# Altium PCB TB16_Control_PCB.PcbDoc
Units mm, origin at the board's own origin, x right, y up, seen from the top; angles counter-clockwise.
Board outline 60 x 43 mm, 2 copper layers (Top Layer, Bottom Layer), stack 1.58 mm thick; 34 components, 49 nets, 159 pads, 68 vias.
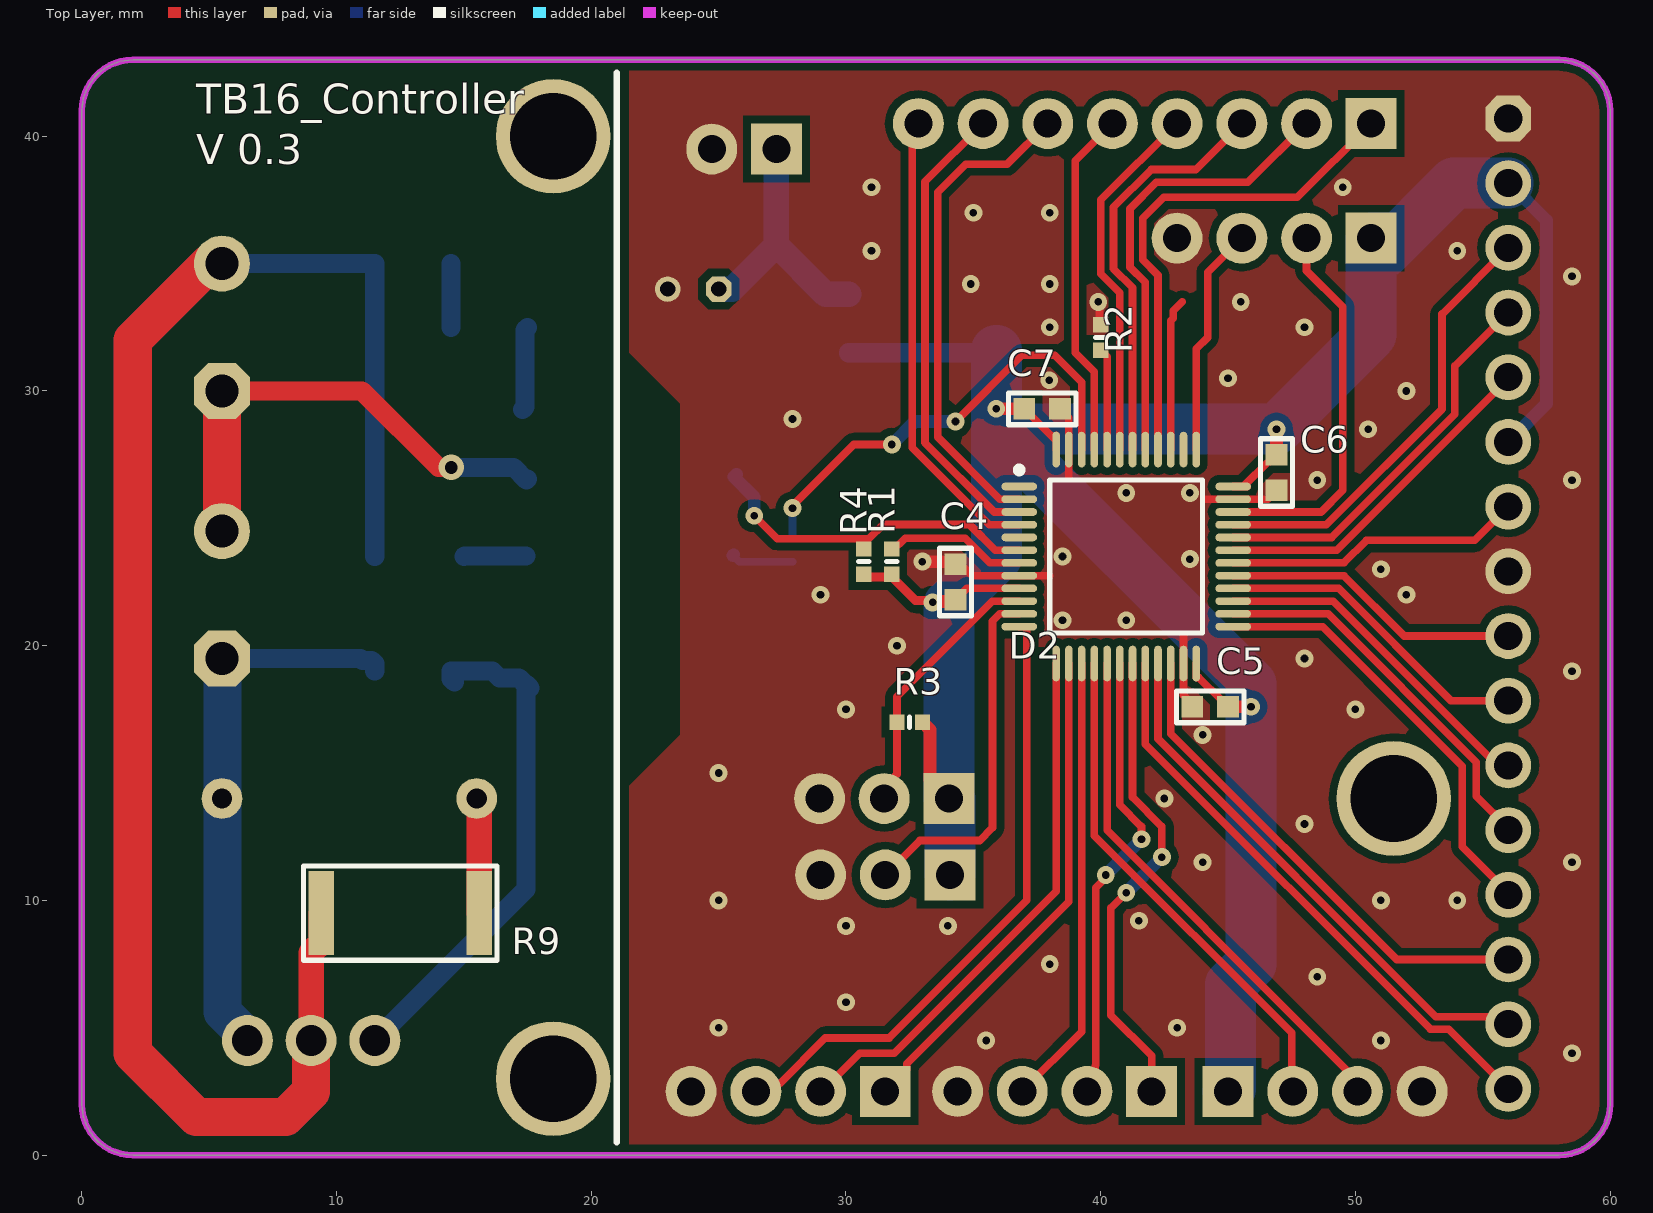
[diagram p0: Top Layer view]
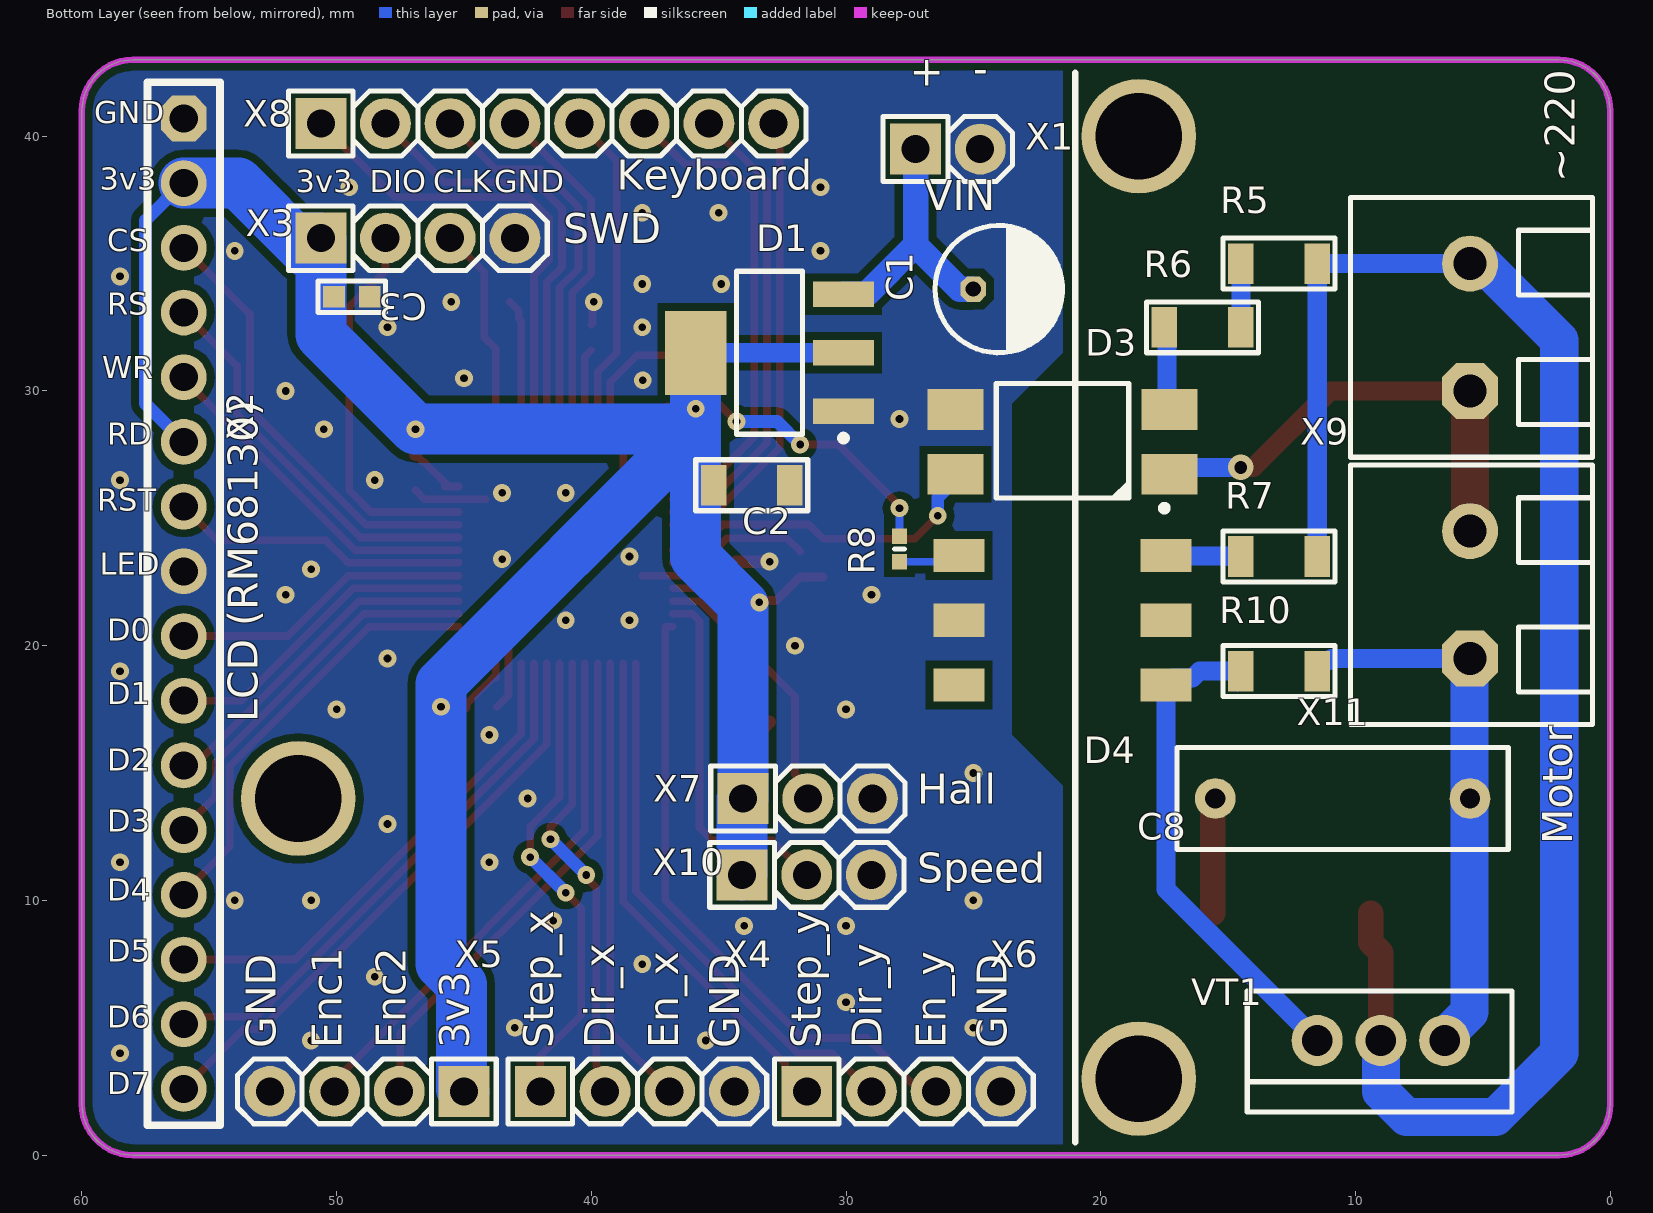
[diagram p1: Bottom Layer view, seen from below]
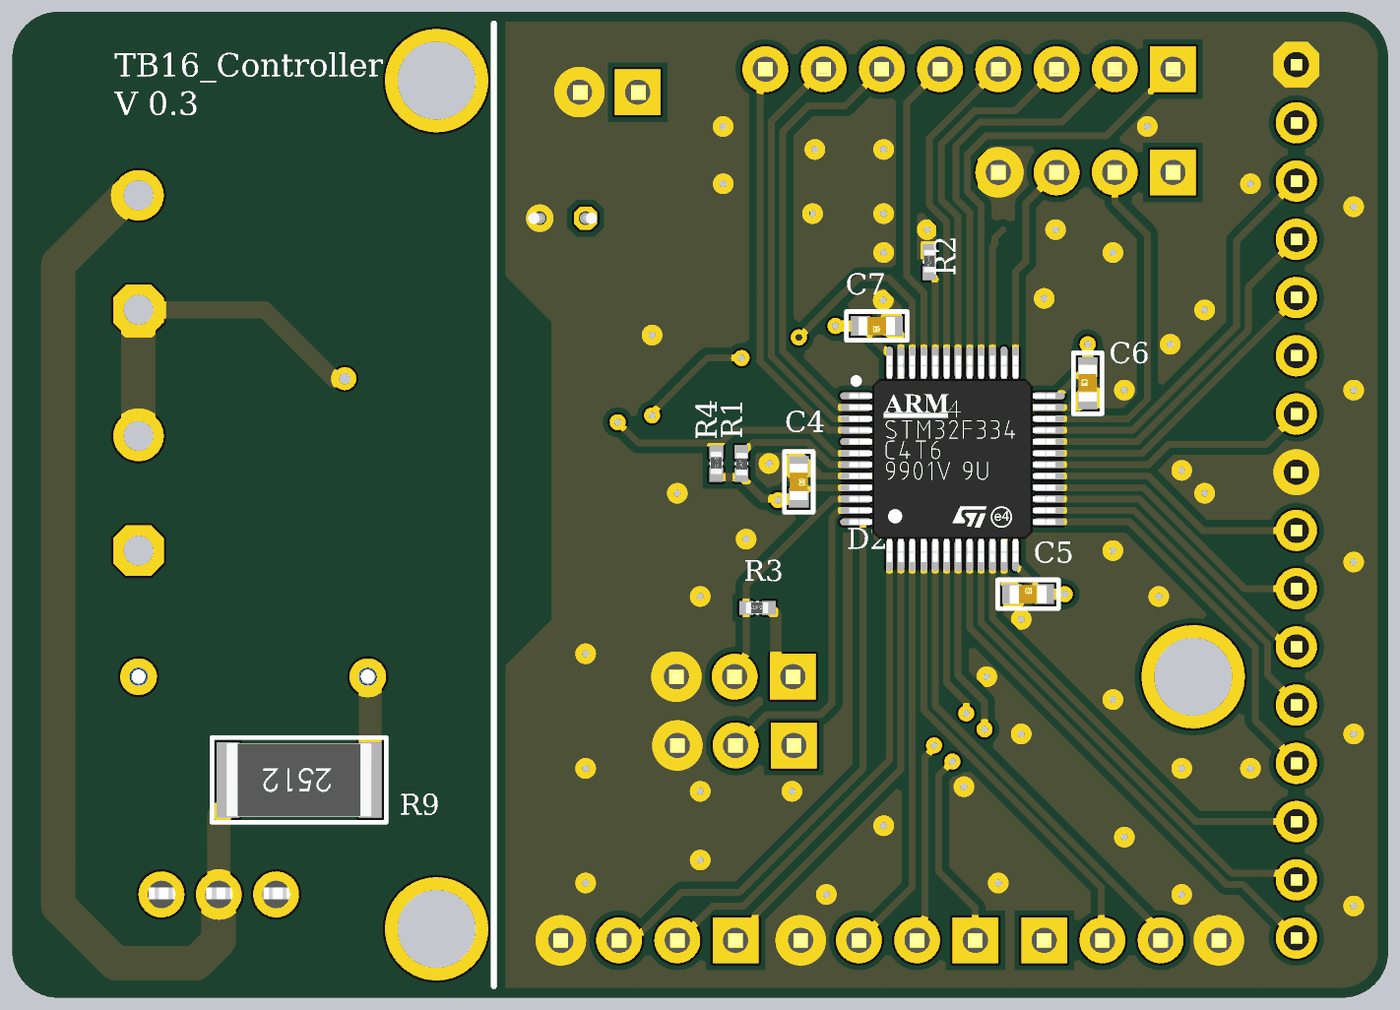
[diagram p2: 3D render of the assembled board from above, using the file's embedded part models]
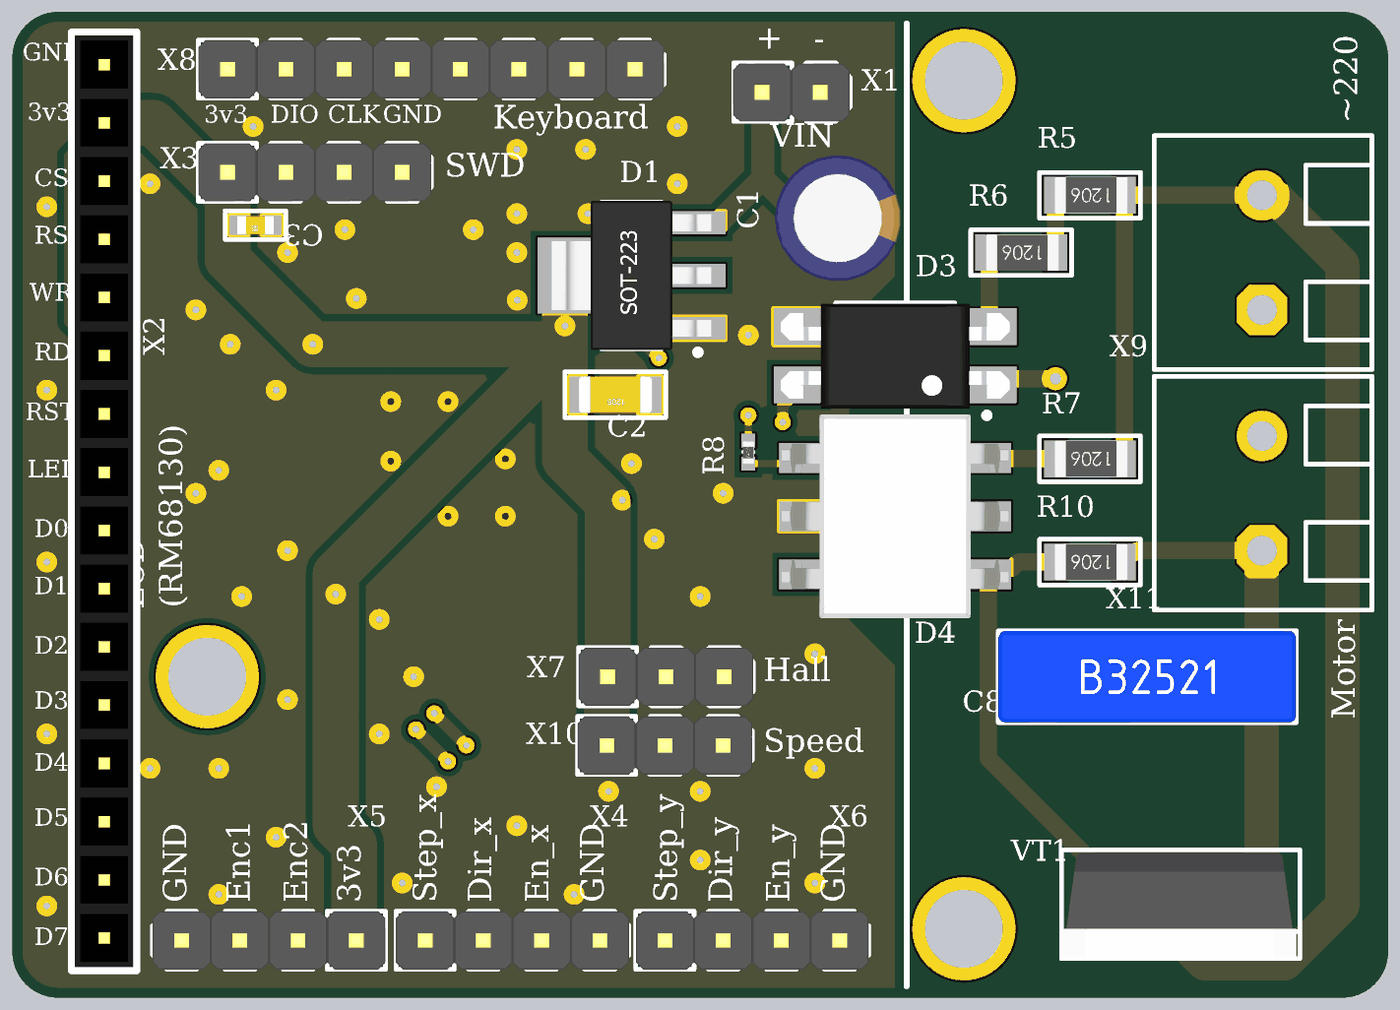
[diagram p3: 3D render of the assembled board from below, using the file's embedded part models]

## Layer stack, top to bottom
Top Solder: solder mask 0.0102, Solder Resist, Dk 3.5
Top Layer: signal copper 0.0356
Dielectric 1: dielectric 1.509, FR-4, Dk 4.8
Bottom Layer: signal copper 0.0356
Bottom Solder: solder mask 0.0102, Solder Resist, Dk 3.5

## Board outline
0,2 0,41 cw(c2,41) 2,43 58,43 cw(c58,41) 60,41 60,2 cw(c58,2) 58,0 2,0 cw(c2,2)

## Design rules (kind name [scope] priority, off if disabled: settings)
Clearance [All] p1: gap=0.2 ignorepadtopadclearanceinfootprint=FALSE except(0.3: Arc-Poly Arc-Hole Track-Poly Track-Hole SMDPad-Poly THPad-Poly Via-Poly Fill-Poly Poly-Poly Poly-Hole)
PlaneConnect [All] p1: planeconnectstyle=Direct reliefexpansion=0.508 reliefentries=4 reliefconductorwidth=0.254 reliefairgap=0.254
PolygonConnect [All] p1: connectstyle=Direct reliefconductorwidth=0.254 reliefentries=4 polygonreliefangle="90 Angle" airgapwidth=0.254
RoutingVias [All] p1: holewidth=0.711 width=1.27 viastyle="Through Hole" minholewidth=0.711 minwidth=1.27 maxholewidth=0.711 maxwidth=1.27
SolderMaskExpansion [All] p1: expansion=0.102 istentingtop=FALSE
Width [All] p1: maxlimit=2 minlimit=0.3 preferedwidth=0.5
29 further rules are at their usual default settings.

## Components (designator, comment, footprint, x,y, rotation, side; value= is the part's Value field where it differs from the comment)
C1 "Aluminium capacitor, 330μF, 25V, ±20%, 54mOhm, 14x10x5 mm, -55...+105°C" "CAP: D5C2H11" 24,34 r180 bottom value=330μF
C2 "Ceramic capacitor, 1μF, X7R, ±10%, 50V, 1206, -55...+125°C" "CAP: 1206" 33.7,26.3 r0 bottom value=1μF
C3 "Ceramic capacitor, 0.1μF, X7R, ±10%, 16V, 603, -55...+125°C" "CAP: 0603" 49.4,33.7 r0 bottom value=0.1μF
C4 "Ceramic capacitor, 0.1μF, X7R, ±10%, 16V, 603, -55...+125°C" "CAP: 0603" 34.3,22.5 r270 top value=0.1μF
C5 "Ceramic capacitor, 0.1μF, X7R, ±10%, 16V, 603, -55...+125°C" "CAP: 0603" 44.3,17.6 r0 top value=0.1μF
C6 "Ceramic capacitor, 0.1μF, X7R, ±10%, 16V, 603, -55...+125°C" "CAP: 0603" 46.9,26.8 r90 top value=0.1μF
C7 "Ceramic capacitor, 0.1μF, X7R, ±10%, 16V, 603, -55...+125°C" "CAP: 0603" 37.7,29.3 r180 top value=0.1μF
C8 "Film capacitor, 0.01μF, 480V, ±10%, 10.9mOhm, 31.5x15 mm, -40...+105°C" "CAP: B32521" 10.5,14 r180 bottom value=0.01μF
D1 "Linear voltage regulator, input 3.9...18V, 0.6V, output 3.3V, 1.2A, -40...+85°C, SOT223" SOT223 33,31.5 r0 bottom
D2 "IC microcontroller, 32-Bit, Cortex-M3, 72MHz, 64KB, 20KB, 2...3.6V, -40...+85°C, 48-LQFP" 48-LQFP 41,23.5 r0 top
D3 "IC optoisolator, 4µs/3µs, 5000Vrms, 35V, -40...+125°C, 4-SMD" 4-SMD 21.5,28 r0 bottom
D4 "MOC3021" SDIP-6 21.5,21 r270 bottom
R1 "Resistor film, 1k, ±5%, 402, 0.063W, -55...+125°C" "RES: 0402" 31.8,23.3 r90 top value=1k
R2 "Resistor film, 1k, ±5%, 402, 0.063W, -55...+125°C" "RES: 0402" 40,32.1 r270 top value=1k
R3 "Resistor film, 2k2, ±5%, 402, 0.063W, -55...+125°C" "RES: 0402" 32.5,17 r0 top value=2k2
R4 "Resistor film, 2k2, ±5%, 402, 0.063W, -55...+125°C" "RES: 0402" 30.7,23.3 r270 top value=2k2
R5 "Resistor film, 10k, ±5%, 1206, 0.25W, -55...+125°C" "RES: 1206" 13,35 r0 bottom value=10k
R6 "Resistor film, 10k, ±5%, 1206, 0.25W, -55...+125°C" "RES: 1206" 16,32.5 r0 bottom value=10k
R7 "Resistor film, 680R, ±5%, 1206, 0.25W, -55...+125°C" "RES: 1206" 13,23.5 r0 bottom value=680R
R8 "Resistor film, 1k, ±5%, 402, 0.063W, -55...+125°C" "RES: 0402" 27.9,23.8 r90 bottom value=1k
R9 "Resistor film, 39R, 1W, 2512, 1W, -55...+125°C" "RES: 2512" 12.5,9.5 r180 top value=39R
R10 "Resistor film, 330R, ±5%, 1206, 0.25W, -55...+125°C" "RES: 1206" 13,19 r0 bottom value=330R
VT1 "BTA136" TO220 9,4.5 r0 bottom
X1 "Connector, 2pin, 2.54mm, 500VAC, 3A" "CON: PLS-2" 26,39.5 r180 bottom
X2 "Connector, 16pin, 2.54mm, 500VAC, 3A" "CON: PBS-16" 56,21.65 r270 bottom
X3 "Connector, 4pin, 2.54mm, 500VAC, 3A" "CON: PLS-4" 46.81,36 r180 bottom
X4 "Connector, 4pin, 2.54mm, 500VAC, 3A" "CON: PLS-4" 38.19,2.5 r180 bottom
X5 "Connector, 4pin, 2.54mm, 500VAC, 3A" "CON: PLS-4" 48.81,2.5 r0 bottom
X6 "Connector, 4pin, 2.54mm, 500VAC, 3A" "CON: PLS-4" 27.73,2.5 r180 bottom
X7 "Connector, 3pin, 2.54mm, 500VAC, 3A" "CON: PLS-3" 31.5,14 r180 bottom
X8 "Connector, 8pin, 2.54mm, 500VAC, 3A" "CON: PLS-8" 41.73,40.5 r180 bottom
X9 "Terminal connector, 2pin, 3.5mm, 300VAC, 10A" "CON: 0395430002 (5 mm)" 5.5,32.5 r90 bottom
X10 "Connector, 3pin, 2.54mm, 500VAC, 3A" "CON: PLS-3" 31.54,11 r180 bottom
X11 "Terminal connector, 2pin, 3.5mm, 300VAC, 10A" "CON: 0395430002 (5 mm)" 5.5,22 r90 bottom

## Footprints (in the part's own frame and the unit in brackets; to place one, negate y for a bottom-side part, rotate by r counter-clockwise, add the part's x,y. Pads: shape width x height; smd on the part's side, far side on the other; paste and mask are expansions set on the pad)
4-SMD [mm] "SOIC, 4-Leads, Body 4,60x6,50mm, Pitch 1,27mm, IPC Medium Density"
  rect 2.2x1.6 smd: 1(-4.2,1.27) 2(-4.2,-1.27) 3(4.2,-1.27) 4(4.2,1.27)
  round 0.5 on Mech2: ""(-2.1,1.7)
  silkscreen extent -4.12,-2.3 2.6,2.72, body extent -5,-2.28 5,2.3, height 3.75
48-LQFP [mm] "QFP, 48-Leads, Body 7x7mm, Pitch 0.5mm, IPC Medium Density"
  oval 1.4x0.3 smd: 1(-4.2,2.75) 2(-4.2,2.25) 3(-4.2,1.75) 4(-4.2,1.25) 5(-4.2,0.75) 6(-4.2,0.25) 7(-4.2,-0.25) 8(-4.2,-0.75) 9(-4.2,-1.25) 10(-4.2,-1.75) 11(-4.2,-2.25) 12(-4.2,-2.75) 25(4.2,-2.75) 26(4.2,-2.25) 27(4.2,-1.75) 28(4.2,-1.25) 29(4.2,-0.75) 30(4.2,-0.25) 31(4.2,0.25) 32(4.2,0.75) 33(4.2,1.25) 34(4.2,1.75) 35(4.2,2.25) 36(4.2,2.75)
  oval 0.3x1.4 smd: 13(-2.75,-4.2) 14(-2.25,-4.2) 15(-1.75,-4.2) 16(-1.25,-4.2) 17(-0.75,-4.2) 18(-0.25,-4.2) 19(0.25,-4.2) 20(0.75,-4.2) 21(1.25,-4.2) 22(1.75,-4.2) 23(2.25,-4.2) 24(2.75,-4.2) 37(2.75,4.2) 38(2.25,4.2) 39(1.75,4.2) 40(1.25,4.2) 41(0.75,4.2) 42(0.25,4.2) 43(-0.25,4.2) 44(-0.75,4.2) 45(-1.25,4.2) 46(-1.75,4.2) 47(-2.25,4.2) 48(-2.75,4.2)
  round 0.5 on Mech1: ""(-4,4)
  silkscreen extent -4.32,-3 3,3.52, body extent -4.5,-4.5 4.5,4.5, height 1.6
"CAP: 0603" [mm]
  rect 0.85x0.85 smd: 1(-0.7,0) 2(0.7,0)
  silkscreen extent -1.33,-0.63 1.33,0.63, body extent -0.8,-0.4 0.8,0.4, height 0.3
"CAP: 1206" [mm]
  rect 1x1.6 smd: 1(-1.5,0) 2(1.5,0)
  silkscreen extent -2.2,-1 2.2,1, body extent -1.6,-0.8 1.6,0.8, height 1
"CAP: B32521" [mm]
  round 1.6 hole 0.8: 1(-5,0) 2(5,0)
  silkscreen extent -6.5,-2 6.5,2, body extent -6.5,-2 6.5,2, height 9
"CAP: D5C2H11" [mm]
  oct 1x1 hole 0.6: 1(-1,0)
  round 1 hole 0.6: 2(1,0)
  silkscreen extent -2.5,-2.5 2.5,2.5, body extent -2.75,-2.75 2.75,2.75, height 13.5
"CON: 0395430002 (5 mm)" [mm] "2 pin 5.08mm screw connector"
  oct 2.2x2.2 hole 1.3: 1(-2.5,0)
  round 2.2 hole 1.3: 2(2.5,0)
  silkscreen extent -5.1,-4.8 5.1,4.7, body extent -5,-4.8 5,4.6, height 14.63
"CON: PBS-16" [mm] "PBS-16"
  oct 1.8x1.8 hole 1.1: 1(-19.05,0)
  round 1.8 hole 1.1: 2(-16.51,0) 3(-13.97,0) 4(-11.43,0) 5(-8.89,0) 6(-6.35,0) 7(-3.81,0) 8(-1.27,0) 9(1.27,0) 10(3.81,0) 11(6.35,0) 12(8.89,0) 13(11.43,0) 14(13.97,0) 15(16.51,0) 16(19.05,0)
  silkscreen extent -20.48,-1.43 20.48,1.43, body extent -20.32,-1.27 20.32,1.27, height 8.27
"CON: PLS-2" [mm]
  rect 2x2 hole 1.1: 1(-1.27,0)
  round 2 hole 1.1: 2(1.27,0)
  silkscreen extent -2.54,-1.27 2.54,1.27, body extent -2.57,-1.28 2.51,1.26, height 8.54
"CON: PLS-3" [mm]
  rect 2x2 hole 1.1: 1(-2.54,0)
  round 2 hole 1.1: 2(0,0) 3(2.54,0)
  silkscreen extent -3.81,-1.27 3.81,1.27, body extent -3.81,-1.27 3.81,1.27, height 8.54
"CON: PLS-4" [mm] "PLS-40 4 pin header"
  rect 2x2 hole 1.1: 1(-3.81,0)
  round 2 hole 1.1: 2(-1.27,0) 3(1.27,0) 4(3.81,0)
  silkscreen extent -5.08,-1.27 5.08,1.27, body extent -5.08,-1.27 5.08,1.27, height 8.54
"CON: PLS-8" [mm] "PLS-40 8 pin header"
  rect 2x2 hole 1.1: 1(-8.89,0)
  round 2 hole 1.1: 2(-6.35,0) 3(-3.81,0) 4(-1.27,0) 5(1.27,0) 6(3.81,0) 7(6.35,0) 8(8.89,0)
  silkscreen extent -10.16,-1.27 10.16,1.27, body extent -10.16,-1.27 10.16,1.27, height 8.54
"RES: 0402" [mm]
  rect 0.6x0.6 smd: 1(-0.5,0) 2(0.5,0)
  silkscreen extent 0,-0.2 0,0.2, body extent -0.52,-0.25 0.47,0.25, height 0.34
"RES: 1206" [mm]
  rect 1x1.6 smd: 1(-1.5,0) 2(1.5,0)
  silkscreen extent -2.2,-1 2.2,1, body extent -1.65,-0.8 1.55,0.8, height 0.47
"RES: 2512" [mm]
  rect 1x3.3 smd: 1(-3.1,0) 2(3.1,0)
  silkscreen extent -3.8,-1.85 3.8,1.85, body extent -3.17,-1.6 3.18,1.6, height 0.52
SDIP-6 [mm] "DIP-6 SMD"
  rect 1.3x2 smd: 1(-2.54,-4.064) 2(0,-4.064) 3(2.54,-4.064) 4(2.54,4.064) 5(0,4.064) 6(-2.54,4.064)
  body extent -4.44,-4.95 4.45,4.95, height 5.93
SOT223 [mm] "SOT223, 4-Leads, Body 6,50x7,00mm (avg), Pitch 2,30mm, IPC Medium Density"
  rect 2.4x1 smd: 1(-2.9,2.3) 2(-2.9,0) 3(-2.9,-2.3)
  rect 2.4x3.3 smd: 4(2.9,0)
  round 0.5 on Mech2: ""(-3,2.7)
  silkscreen extent -3.02,-3.2 1.3,3.47, body extent -3.48,-3.25 3.48,3.25, height 1.65
TO220 [mm]
  round 2 hole 1.2: 1(-2.5,0) 2(0,0) 3(2.5,0)
  silkscreen extent -5.15,-1.95 5.25,2.8, body extent -5,-1.8 5.2,2.7, height 22.06

## Part data
C1: library part Aluminium, Manufacturer=Wurth, Package="14x10x5 mm", PartNumber=860080475013, Temperature=-55...+105°C, Tolerance=±20%, TypeCapacitor="Aluminium capacitor", Voltage=25V, HelpURL=https://www.digikey.com/product-detail/en/wurth-electronics-inc/860080475013/732-9029-1-ND/5728972, Impedance=54mOhm, ValueManufacturerPartNumber="Aluminium capacitor, 330μF, 25V, ±20%, 54mOhm, 14x10x5 mm, -55...+105°C"
C2: library part Ceramic_1206, Manufacturer=Yageo, Package=1206, PartNumber=CC1206KRX7R9BB104, Temperature=-55...+125°C, Tolerance=±10%, TypeCapacitor="Ceramic capacitor", TypeDielectric=X7R, Voltage=50V, HelpURL=https://www.digikey.com/product-detail/en/yageo/CC1206KRX7R9BB104/311-1179-1-ND/303089, ValueManufacturerPartNumber="Ceramic capacitor, 1μF, X7R, ±10%, 50V, 1206, -55...+125°C"
C3 C4 C5 C6 C7: library part Ceramic_0603, Manufacturer=Yageo, Package=0603, PartNumber=CC0603KRX7R7BB104, Temperature=-55...+125°C, Tolerance=±10%, TypeCapacitor="Ceramic capacitor", TypeDielectric=X7R, Voltage=16V, HelpURL=https://www.digikey.com/product-detail/en/yageo/CC0603KRX7R7BB104/311-1088-1-ND/302998, ValueManufacturerPartNumber="Ceramic capacitor, 0.1μF, X7R, ±10%, 16V, 603, -55...+125°C"
C8: library part Film, Manufacturer=Epcos, Package="31.5x15 mm", PartNumber=B32774D4106K000, Temperature=-40...+105°C, Tolerance=±10%, TypeCapacitor="Film capacitor", Voltage=480V, HelpURL=https://www.digikey.com/products/en/capacitors/film-capacitors/62?k=&pkeyword=&sv=0&pv2097=1958&sf=0&FV=fffc01ef%2C1f140000%2Cffe0003e%2Cffec6366&quantity=1&ColumnSort=1000011&page=1&stock=1&pageSize=25, Impedance=10.9mOhm, ValueManufacturerPartNumber="Film capacitor, 0.01μF, 480V, ±10%, 10.9mOhm, 31.5x15 mm, -40...+105°C"
D1: library part LDL1117S33R, "Linear voltage regulator", CurrentOutput=1.2A, Manufacturer=STMicroelectronics, Package=SOT223, Temperature=-40...+85°C, VoltageInput="input 3.9...18V", VoltageOutput="output 3.3V", ComponentType="Linear voltage regulator", HelpURL=https://www.digikey.com/product-detail/en/stmicroelectronics/LDL1117S33R/497-17239-1-ND/7102079, MaxDropout=0.6V, PartNumber=LDL1117S33R, ValueManufacturerPartNumber="Linear voltage regulator, input 3.9...18V, 0.6V, output 3.3V, 1.2A, -40...+85°C, SOT223"
D2: library part STM32F103C8T6, "Cortex-M3", Manufacturer=STMicroelectronics, Package=48-LQFP, Temperature=-40...+85°C, ComponentType="IC microcontroller", CoreProcessor=Cortex-M3, CoreSize=32-Bit, HelpURL=https://www.digikey.com/product-detail/en/stmicroelectronics/STM32F103C8T6TR/497-17666-1-ND/7804402, MemoryRAM=20KB, MemoryROM=64KB, PartNumber=STM32F103C8T6, Speed=72MHz, Supply=2...3.6V, ValueManufacturerPartNumber="IC microcontroller, 32-Bit, Cortex-M3, 72MHz, 64KB, 20KB, 2...3.6V, -40...+85°C, 48-LQFP"
D3: library part LTV-817, "Optoisolator", Manufacturer=Lite-On, Package=4-SMD, PartNumber=LTV-817S, Temperature=-40...+125°C, ComponentType="IC optoisolator", DataRate=4µs/3µs, HelpURL=https://www.digikey.com/product-detail/en/lite-on-inc/LTV-817S/160-1367-5-ND/385837, Isolation=5000Vrms, Supply=35V, ValueManufacturerPartNumber="IC optoisolator, 4µs/3µs, 5000Vrms, 35V, -40...+125°C, 4-SMD"
D4: "Optotriac"
R1 R2 R3 R4 R8: library part Resistor_0402, Manufacturer=Yageo, Package=0402, PartNumber=RC0402JR-07100RL, Power=0.063W, Temperature=-55...+125°C, Tolerance=±5%, TypeResistor="Resistor film", HelpURL=https://www.digikey.com/product-detail/en/yageo/RC0402JR-07100RL/311-100JRCT-ND/729362
  R1 R2 R8: ValueManufacturerPartNumber="Resistor film, 1k, ±5%, 402, 0.063W, -55...+125°C"
  R3 R4: ValueManufacturerPartNumber="Resistor film, 2k2, ±5%, 402, 0.063W, -55...+125°C"
R5 R6 R7 R10: library part Resistor_1206, Manufacturer=Yageo, Package=1206, PartNumber=RC1206JR-07100RL, Power=0.25W, Temperature=-55...+125°C, Tolerance=±5%, TypeResistor="Resistor film", HelpURL=https://www.digikey.com/product-detail/en/yageo/RC1206JR-07100RL/311-100ERCT-ND/732153
  R5 R6: ValueManufacturerPartNumber="Resistor film, 10k, ±5%, 1206, 0.25W, -55...+125°C"
  R7: ValueManufacturerPartNumber="Resistor film, 680R, ±5%, 1206, 0.25W, -55...+125°C"
  R10: ValueManufacturerPartNumber="Resistor film, 330R, ±5%, 1206, 0.25W, -55...+125°C"
R9: library part Resistor_2512, Manufacturer=Yageo, Package=2512, PartNumber=RC2512JK-07100RL, Power=1W, Temperature=-55...+125°C, TypeResistor="Resistor film", HelpURL=https://www.digikey.com/product-detail/en/yageo/RC2512JK-07100RL/YAG3393CT-ND/5962215, Tolerance=1W, ValueManufacturerPartNumber="Resistor film, 39R, 1W, 2512, 1W, -55...+125°C"
VT1: "Triac"
X1: library part PLS-2, CurrentMax=3A, Manufacturer=Connfly, VoltageMax=500VAC, CommentText=Vin, HelpURL=https://www.chipdip.ru/product/pls-2, Multichannel=2pin, PartNumber=PLS-2, Pitch=2.54mm, TypeConnector=Connector, ValueManufacturerPartNumber="Connector, 2pin, 2.54mm, 500VAC, 3A"
X2: library part PBS-16, CurrentMax=3A, Manufacturer=Connfly, VoltageMax=500VAC, CommentText=Display, HelpURL=https://www.chipdip.ru/product/pbs16, Multichannel=16pin, PartNumber=PBS-16, Pitch=2.54mm, TypeConnector=Connector, ValueManufacturerPartNumber="Connector, 16pin, 2.54mm, 500VAC, 3A"
X3 X4 X5 X6: library part PLS-4, CurrentMax=3A, Manufacturer=Connfly, VoltageMax=500VAC, HelpURL=https://www.chipdip.ru/product/pls-4, Multichannel=4pin, PartNumber=PLS-4, Pitch=2.54mm, TypeConnector=Connector, ValueManufacturerPartNumber="Connector, 4pin, 2.54mm, 500VAC, 3A"
  X3: CommentText=SWD
  X4: CommentText="Stepper motor (X)"
  X5: CommentText=Encodder
  X6: CommentText="Stepper motor (Y)"
X7 X10: library part PLS-3, CurrentMax=3A, Manufacturer=Connfly, VoltageMax=500VAC, HelpURL=https://www.chipdip.ru/product/pls-3, Multichannel=3pin, PartNumber=PLS-3, Pitch=2.54mm, TypeConnector=Connector, ValueManufacturerPartNumber="Connector, 3pin, 2.54mm, 500VAC, 3A"
  X7: CommentText="Hall sensor"
  X10: CommentText=Speed
X8: library part PLS-8, CurrentMax=3A, Manufacturer=Connfly, VoltageMax=500VAC, CommentText=Keyboard, HelpURL=https://www.chipdip.ru/product/pls-8-ds1021-1-8sf112, Multichannel=8pin, PartNumber=PLS-8, Pitch=2.54mm, TypeConnector=Connector, ValueManufacturerPartNumber="Connector, 8pin, 2.54mm, 500VAC, 3A"
X9 X11: library part Connector_terminal_2pin, CurrentMax=10A, Manufacturer=Degson, PartNumber=DG350-3.5-02P-14, VoltageMax=300VAC, HelpURL=https://www.chipdip.ru/product/dg350-3.5-02p-12, Multichannel=2pin, Pitch=3.5mm, TypeConnector="Terminal connector", ValueManufacturerPartNumber="Terminal connector, 2pin, 3.5mm, 300VAC, 10A"
  X9: CommentText="~220, 50Hz"
  X11: CommentText=Motor

## Free pads (board coordinates)
  round 4.5 hole 3.4: 1(18.5,3) 1(18.5,40) 1(51.5,14)

## Via types
v1: diameter 0.7, hole 0.3, Top Layer to Bottom Layer, 67 vias
v2: diameter 1, hole 0.5, Top Layer to Bottom Layer, 1 vias

## Nets (pads, with @x,y where several pads share a name; then routed paths per layer and width w, separated by ;. In a path a pad name is that pad's centre, name@x,y a point inside that pad or via, vN(x,y) a via of type N, cw(c..) or ccw(c..) an arc to the next point about the centre after c; other vN are vias at no path point)
CS: D2.33 X2.3 | length 17.5
  Top Layer w0.3: D2.33 48.857,24.75 53.4,29.293 53.4,33.02 X2.3
D0: D2.29 X2.9 | length 11.8
  Top Layer w0.3: D2.29 49.55,22.75 51.92,20.38 X2.9
D1: D2.28 X2.10 | length 12.6
  Top Layer w0.3: D2.28 49.343,22.25 53.753,17.84 X2.10
D2: D2.27 X2.11 | length 13.5
  Top Layer w0.3: D2.27 49.136,21.75 55.299,15.587 55.713,15.587 X2.11
D3: D2.26 X2.12 | length 15.1
  Top Layer w0.3: D2.26 48.929,21.25 54.75,15.429 54.75,14.092 56,12.842 X2.12
D4: D2.25 X2.13 | length 17.1
  Top Layer w0.3: D2.25 48.722,20.75 54.2,15.272 54.2,12.1 56,10.3 X2.13
D5: D2.22 X2.14 | length 19.7
  Top Layer w0.3: D2.22 42.75,16.55 51.62,7.68 X2.14
D6: D2.21 X2.15 | length 21.3
  Top Layer w0.3: D2.21 42.25,16.343 53.157,5.436 55.704,5.436 X2.15
D7: D2.20 X2.16 | length 23
  Top Layer w0.3: D2.20 41.75,16.136 52.95,4.936 53.664,4.936 X2.16
DIR_X: D2.18 X4.2 | length 18
  Top Layer w0.3: X4.2 39.785,2.825 39.785,3.511 39.8,3.526 39.8,10.492 40.2,10.892 v1(40.2,11) ; D2.18 40.75,13.75 41.6,12.9 v1(41.6,12.4)
  Bottom Layer w0.5: v1(40.2,11) v1@41.6,12.4
DIR_Y: D2.13 X6.2 | length 21.4
  Top Layer w0.3: X6.2 29.045,2.5 30.545,4 31.893,4 38.25,10.357 D2.13
EN_X: D2.15 X4.3 | length 17.8
  Top Layer w0.3: X4.3 36.92,2.52 39.25,4.85 D2.15
EN_Y: D2.12 X6.3 | length 24.8
  Top Layer w0.3: X6.3 26.785,2.825 27.416,2.825 29.191,4.6 31.7,4.6 37.1,10 37.1,20.75 D2.12
Enc1: D2.16 X5.2 | length 20
  Top Layer w0.3: D2.16 39.75,12.543 47.494,4.799 47.494,2.546 X5.2
Enc2: D2.17 X5.3 | length 20.9
  Top Layer w0.3: D2.17 40.25,12.75 47.994,5.006 50.08,2.92 X5.3
GND: C1.2 C2.1 C3.1 C4.1 C5.1 C6.1 C7.1 D1.1 D2.8 D2.23 D2.35 D2.47 D3.3 D4.2 R2.1 X1.2 X2.1 X2.8 X3.4 X4.4 X5.4 X6.4 X7.3 X10.3 | length 14.9
  Top Layer w0.3: C4.1@34.35,23.25 34.4,23.3 34.95,22.75 D2.8 38,22.75 ; C7.1 38.75,28.95 D2.47 38.75,26.6 ; v1(39.9,33.5) 39.95,33.45 39.95,32.65 R2.1 ; 43.25,20.35 D2.23 43.25,18.05 C5.1@43.7,17.6 ; 44.15,25.75 D2.35 46.55,25.75 C6.1
  Top Layer w0.5: v1(33,23.3) 34.3,23.3 C4.1@34.35,23.25
  other v1: 58.5,4 35.5,4.5 51,4.5 25,5 43,5 30,6 48.5,7 38,7.5 30,9 34,9 41.5,9.2 25,10 51,10 54,10 44,11.5 58.5,11.5 48,13 42.5,14 25,15 44,16.5 30,17.5 50,17.5 58.5,19 48,19.5 32,20 38.5,21 41,21 29,22 52,22 51,23 43.5,23.4 38.5,23.5 41,26 43.5,26 48.5,26.5 58.5,26.5 50.5,28.5 27.9,28.9 52,30 37.982,30.425 45,30.5 38,32.5 48,32.5 45.5,33.5 34.9,34.2 38,34.2 58.5,34.5 31,35.5 54,35.5 35,37 38,37 31,38 49.5,38
HALL: D2.10 R3.1 X7.2 | length 10.6
  Top Layer w0.3: X7.2 31.5,14.46 32,14.96 32,16.5 R3.1 32,18 35.75,21.75 D2.10
LCDrst: D2.30 X2.7 | length 11.7
  Top Layer w0.3: D2.30 49.55,23.25 50.437,24.137 54.677,24.137 X2.7
Motor: D2.46 R8.2 | length 18.1
  Top Layer w0.3: v1(27.9,25.4) 27.9,25.5 30.3,27.9 v1(31.8,27.9) ; v1(34.3,28.8) 36.898,31.398 38.202,31.398 39.25,30.35 D2.46
  Bottom Layer w0.3: R8.2 v1(27.9,25.4)
  Bottom Layer w0.5: v1(31.8,27.9) 32.7,28.8 v1(34.3,28.8)
NetC1_1: C1.1 D1.3 X1.1 | length 10.4
  Bottom Layer w1: C1.1 25.54,34 27.27,35.73 ; X1.1 27.27,35.73 ; D1.3 29.2,33.8 27.27,35.73
NetC8_1: C8.1 R9.1 | length 4.5
  Top Layer w1: C8.1 15.6,13.9 R9.1
NetC8_2: C8.2 R10.1 VT1.1 X11.1 | length 21.8
  Bottom Layer w0.75: X11.1 10.936,19.5 11.011,19.425 11.375,19.425 11.5,19.3 R10.1
  Bottom Layer w1.5: X11.1 5.5,19.169 5.519,19.15 5.519,5.616 6.5,4.635 VT1.1
NetD2_7: D2.7 R1.2 | length 5.6
  Top Layer w0.3: R1.2@31.8,23.7 32.321,24.221 34.679,24.221 35.65,23.25 D2.7
NetD2_44: D2.44 R2.2 | length 4
  Top Layer w0.3: R2.2 40.25,31.35 D2.44
NetD3_1: D3.1 X9.1 X11.2 | length 19
  Top Layer w0.75: X9.1 11,30 14,27 v2(14.5,27)
  Top Layer w1.5: X11.2 X9.1
  Bottom Layer w0.75: v2(14.5,27) 16.952,27 17.452,26.5 D3.1@17.5,26.548
NetD3_2: D3.2 R6.2 | length 3.3
  Bottom Layer w0.75: D3.2 17.4,29.37 17.4,32.4 R6.2
NetD4_1: D4.1 R8.1 | length 2.5
  Bottom Layer w0.3: D4.1 25.804,23.3 R8.1
  Bottom Layer w0.5: D4.1 D4.1@25.594,23.57
NetD4_4: D4.4 R10.2 VT1.3 | length 20.3
  Bottom Layer w0.75: VT1.3 17.436,10.436 D4.4 17.161,18.735 16.39,18.735 16.125,19 R10.2 14.5,18.7 R10.2@14.625,18.575 ; D4.4@17.436,18.5 D4.4@17.592,18.344
NetD4_6: D4.6 R7.2 | length 2.4
  Bottom Layer w0.75: R7.2@15,23.5 15.02,23.52 D4.6@17.436,23.52
NetR5_1: R5.1 R7.1 R9.2 VT1.2 X9.2 | length 108.6
  Top Layer w1: VT1.2 9,7.95 9.4,8.35 R9.2
  Top Layer w1.5: X9.2@5,35 2,32 2,4 4.5,1.5 8,1.5 9,2.5 VT1.2
  Bottom Layer w0.75: X9.2 R5.1 R7.1
  Bottom Layer w1.5: X9.2 5.366,34.866 4.866,34.866 2,32 2,4 4.5,1.5 8,1.5 9,2.5 VT1.2
NetR5_2: R5.2 R6.1 | length 2.5
  Bottom Layer w0.75: R6.1 R5.2
PB4: D2.40 X8.1 | length 19.8
  Top Layer w0.3: D2.40 42.25,34.55 41.65,35.15 41.65,36.774 42.476,37.6 47.72,37.6 X8.1
PB5: D2.41 X8.2 | length 18
  Top Layer w0.3: D2.41 41.75,34.264 41.15,34.864 41.15,37.157 42.187,38.194 45.774,38.194 X8.2
PB6: D2.42 X8.3 | length 16.2
  Top Layer w0.3: D2.42 41.25,34.057 40.5,34.807 40.5,37.214 41.98,38.694 43.734,38.694 X8.3
PB7: D2.43 X8.4 | length 14.4
  Top Layer w0.3: D2.43 40.75,33.85 40,34.6 40,37.5 X8.4
PB8: D2.45 X8.5 | length 13.7
  Top Layer w0.3: D2.45 39.75,30.75 39,31.5 39,39.04 X8.5
PC13: D2.2 X8.6 | length 19.3
  Top Layer w0.3: D2.2 36.043,25.75 33.6,28.193 33.6,37.8 34.7,38.9 36.32,38.9 X8.6
PC14: D2.3 X8.7 | length 18.3
  Top Layer w0.3: X8.7 33.1,38.22 33.1,27.976 35.826,25.25 D2.3
PC15: D2.4 X8.8 | length 18.3
  Top Layer w0.3: X8.8 32.6,40.26 32.6,27.769 35.619,24.75 D2.4
Pot: D2.11 X10.2 | length 14.3
  Top Layer w0.3: X10.2 32.89,12.35 35.25,12.35 35.75,12.85 35.75,20.957 36.043,21.25 D2.11
RS: D2.32 X2.4 | length 15.6
  Top Layer w0.3: D2.32 49.064,24.25 53.9,29.086 53.9,30.98 X2.4
STEP_X: D2.19 X4.1 | length 18.8
  Top Layer w0.3: v1(41,10.3) 40.4,9.7 40.4,5.5 42,3.9 X4.1 ; D2.19 41.25,14.05 42.4,12.9 v1(42.4,11.7)
  Bottom Layer w0.5: v1(41,10.3) v1(42.4,11.7)
STEP_Y: D2.14 X6.1 | length 19.8
  Top Layer w0.3: X6.1 32.39,3.35 32.39,3.59 38.75,9.95 D2.14
SWDCLK: D2.37 X3.3 | length 9
  Top Layer w0.3: D2.37 43.75,31.65 44.2,32.1 44.2,34.66 X3.3
SWDIO: D2.34 X3.2 | length 15.1
  Top Layer w0.3: D2.34 48.65,25.25 49.5,26.1 49.5,33.3 48.08,34.72 X3.2
SWO: D2.39 | length 6
  Top Layer w0.3: D2.39 42.75,32.75 42.85,32.85 42.85,33.15 43.2,33.5
VCC3V3: C2.2 C3.2 C4.2 C5.2 C6.2 C7.2 D1.2 D1.4 D2.9 D2.24 D2.36 D2.48 R1.1 R3.2 R4.2 X2.2 X2.6 X3.1 X5.1 X7.1 X10.1 | length 114.7
  Top Layer w0.3: C4.2 34.75,22.25 D2.9 ; C7.2 D2.48@38.2,28.1 ; D2.48 D2.48@38.25,28.25 ; D2.24 43.75,18.75 43.85,18.75 44.725,17.875 C5.2 ; D2.36 D2.36@45.599,26.25 ; D2.36@45.75,26.25 D2.36@45.599,26.25 ; C6.2 46.625,27.225 46.574,27.225 D2.36@45.599,26.25
  Top Layer w0.35: R4.2@30.9,22.7 31.8,22.7 32.733,21.767 33.333,21.767 v1(33.4,21.7)
  Top Layer w0.5: R3.2 33.3,16.7 33.3,14.74 X7.1 ; v1(33.4,21.7) 33.438,21.738 34.238,21.738 C4.2 ; v1(35.9,29.3) C7.2 ; C5.2 v1(45.9,17.6) ; C6.2 v1(46.9,28.5)
  Bottom Layer w0.5: D1.4@35.8,31.5 D1.4@35.9,31.6 ; X2.6 57.5,29.5 57.5,36.7 56.04,38.16 X2.2
  Bottom Layer w0.75: D1.2 D1.4@35.8,31.5
  Bottom Layer w2: X7.1 34.04,21.612 35.9,23.472 35.9,26.3 35.9,28.5 ; X10.1 X7.1@34.08,14 ; D1.4@35.9,31.6 v1(35.9,29.3) 35.9,28.5 ; 36.836,28.5 v1(46.9,28.5) 50.62,32.22 50.62,33.7 50.62,35 X3.1 X3.1@51.2,36 ; X5.1 45.1,2.6 45.1,6.7 45.9,7.5 v1(45.9,17.6) 45.9,18.5 35.9,28.5 ; X3.1@51.16,35.46 53.86,38.16 X2.2
WR: D2.31 X2.5 | length 13.6
  Top Layer w0.3: D2.31 49.271,23.75 56,30.479 X2.5@56,30.516
ZeroCross: D2.6 D3.4 R4.1 | length 13.4
  Top Layer w0.3: v1(26.4,25.1) 27.3,24.2 30.9,24.2 31.459,24.759 34.848,24.759 35.857,23.75 D2.6
  Bottom Layer w0.5: D3.4 25.6,26.63 26.4,25.83 v1(26.4,25.1)
pads on no net: D1. D2. D2.1 D2.5 D2.38 D3. D4.3 D4.5

## Polygon pours and split planes (outlines as drawn)
GND on Bottom Layer "GND_L02_P001" (solid, remove dead copper, pour order 1): 60,0 60,43 21.5,43 21.5,31.5 23.5,29.5 23.5,16.5 21.5,14.5 21.5,0
no net on Bottom Layer "NONET_L02_P000" (solid, pour order 0): 99,3.5
GND on Top Layer "GND_L01_P002" (solid, remove dead copper, pour order 2): 60,0 60,43 21.5,43 21.5,31.5 23.5,29.5 23.5,16.5 21.5,14.5 21.5,0

## Keep-outs
Keep-Out Layer:
  the board outline again, w0.254

## Silkscreen, mask and mechanical layers (free items; w line width, h text height)
Top Overlay:
  lines w0.254: 21,0.5 21,42.5
  text "TB16_Controller  / V 0.3" at 4.5,38.5 h2
Bottom Overlay:
  lines w0.254: 21,0.5 21,42.5
  text "-" at 25,41.7 h2
  text "+" at 27.5,41.6 h2
  text "GND" at 59.517,40.214 h1.5
  text "~220" at 1,38.2 h2 r270
  text "3v3" at 59.3,37.6 h1.5
  text "Keyboard" at 39,37.5 h2
  text "GND" at 43.8,37.5 h1.5
  text "CLK" at 46.2,37.5 h1.5
  text "DIO" at 48.7,37.5 h1.5
  text "3v3" at 51.6,37.5 h1.5
  text "VIN" at 26.9,36.7 h2
  text "SWD" at 41.1,35.4 h2
  text "CS" at 59,35.2 h1.5
  text "RS" at 59,32.7 h1.5
  text "WR" at 59.2,30.2 h1.5
  text "RD" at 59,27.6 h1.5
  text "RST" at 59.4,25 h1.5
  text "LED" at 59.3,22.5 h1.5
  text "D0" at 59,19.9 h1.5
  text "D1" at 59,17.4 h1.5
  text "LCD (RM68130)" at 52.7,17 h2 r270
  text "D2" at 59,14.8 h1.5
  text "Hall" at 27.2,13.4 h2
  text "D3" at 59,12.4 h1.5
  text "Motor" at 1.1,12.2 h2 r270
  text "Speed" at 27.2,10.3 h2
  text "D4" at 59,9.7 h1.5
  text "D5" at 59,7.3 h1.5
  text "D6" at 59,4.7 h1.5
  text "GND" at 23.3,4.2 h2 r270
  text "En_y" at 25.7,4.2 h2 r270
  text "Dir_y" at 28.2,4.2 h2 r270
  text "Step_y" at 30.6,4.2 h2 r270
  text "GND" at 33.8,4.2 h2 r270
  text "En_x" at 36.2,4.2 h2 r270
  text "Dir_x" at 38.7,4.2 h2 r270
  text "Step_x" at 41.1,4.2 h2 r270
  text "3v3" at 44.4,4.2 h2 r270
  text "Enc2" at 46.9,4.2 h2 r270
  text "Enc1" at 49.4,4.2 h2 r270
  text "GND" at 52,4.2 h2 r270
  text "D7" at 59,2.1 h1.5

## Dimensions
2,43 to 2,0 on Border
0,41 to 60,41 on Border